# EAGLE board terminalhelper (EAGLE 8.2.2)
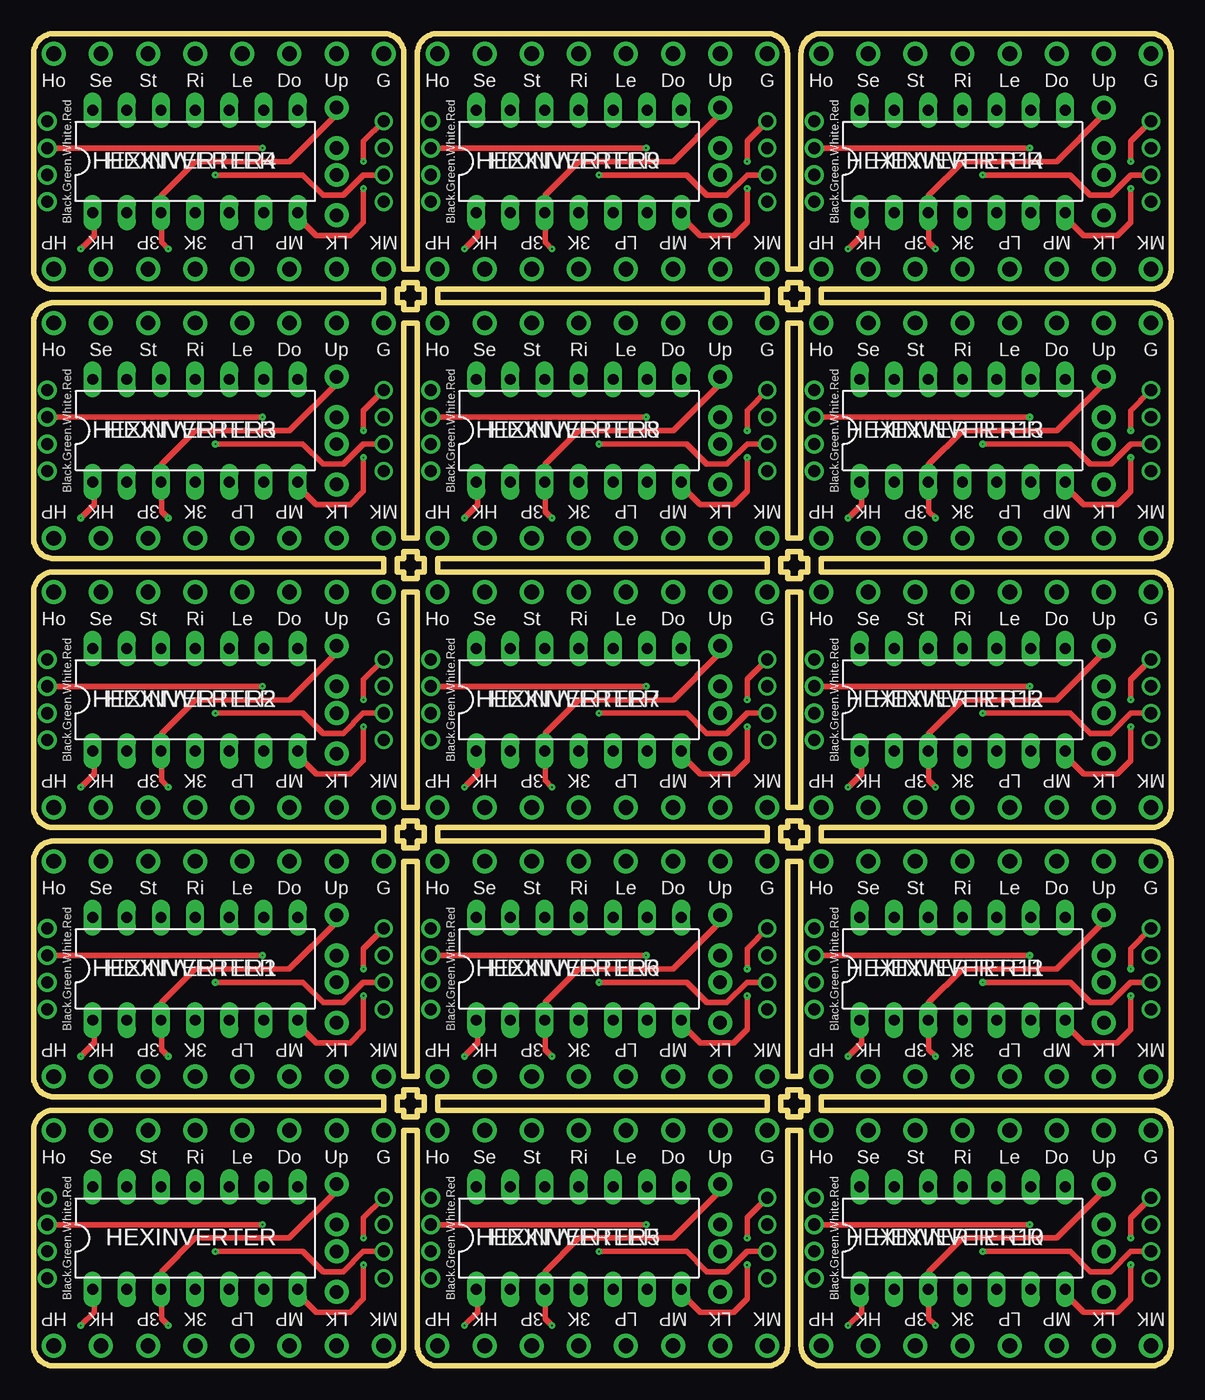
[diagram p0: board, top side]
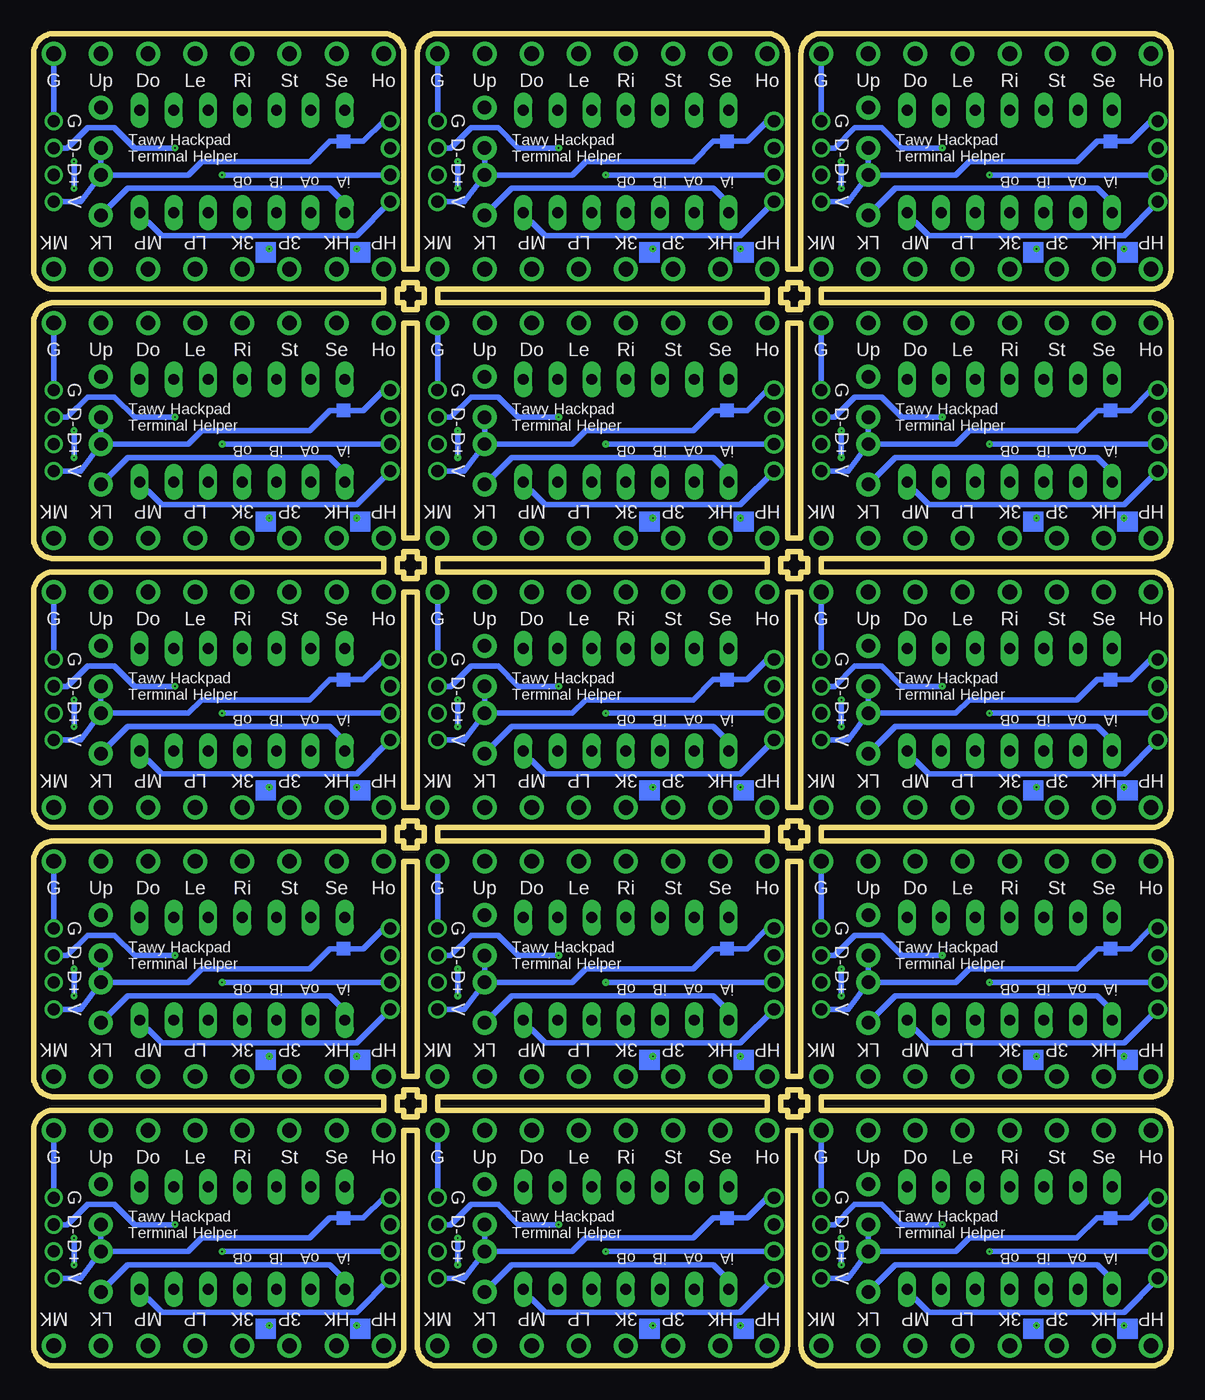
[diagram p1: board, bottom side, seen from below]

Size 84.5 x 99 mm. Coordinates in mm from the lower left corner, seen from the top.
Outline: 0,17.5 0,1.5 arc90 1.5,0 26,0 arc90 27.5,1.5 27.5,17.5 28.5,17.5 28.5,1.5 arc90 30,0 54.5,0 arc90 56,1.5 56,17.5 57,17.5 57,1.5 arc90 58.5,0 83,0 arc90 84.5,1.5 84.5,17.5 arc90 83,19 58.5,19 58.5,20 83,20 arc90 84.5,21.5 84.5,37.5 arc90 83,39 58.5,39 58.5,40 83,40 arc90 84.5,41.5 84.5,57.5 arc90 83,59 58.5,59 58.5,60 83,60 arc90 84.5,61.5 84.5,77.5 arc90 83,79 58.5,79 58.5,80 83,80 arc90 84.5,81.5 84.5,97.5 arc90 83,99 58.5,99 arc90 57,97.5 57,81.5 56,81.5 56,97.5 arc90 54.5,99 30,99 arc90 28.5,97.5 28.5,81.5 27.5,81.5 27.5,97.5 arc90 26,99 1.5,99 arc90 0,97.5 0,81.5 arc90 1.5,80 26,80 26,79 1.5,79 arc90 0,77.5 0,61.5 arc90 1.5,60 26,60 26,59 1.5,59 arc90 0,57.5 0,41.5 arc90 1.5,40 26,40 26,39 1.5,39 arc90 0,37.5 0,21.5 arc90 1.5,20 26,20 26,19 1.5,19 arc90 0,17.5
Outline: 27.5,21.5 27.5,37.5 28.5,37.5 28.5,21.5 27.5,21.5
Outline: 27.5,41.5 27.5,57.5 28.5,57.5 28.5,41.5 27.5,41.5
Outline: 27.5,61.5 27.5,77.5 28.5,77.5 28.5,61.5 27.5,61.5
Outline: 54.5,19 30,19 30,20 54.5,20 54.5,19
Outline: 56,21.5 56,37.5 57,37.5 57,21.5 56,21.5
Outline: 54.5,39 30,39 30,40 54.5,40 54.5,39
Outline: 56,41.5 56,57.5 57,57.5 57,41.5 56,41.5
Outline: 54.5,59 30,59 30,60 54.5,60 54.5,59
Outline: 56,61.5 56,77.5 57,77.5 57,61.5 56,61.5
Outline: 54.5,79 30,79 30,80 54.5,80 54.5,79
Outline: 27.5,60.5 27.5,60 27,60 27,59 27.5,59 27.5,58.5 28.5,58.5 28.5,59 29,59 29,60 28.5,60 28.5,60.5 27.5,60.5
Outline: 27.5,40.5 27.5,40 27,40 27,39 27.5,39 27.5,38.5 28.5,38.5 28.5,39 29,39 29,40 28.5,40 28.5,40.5 27.5,40.5
Outline: 27.5,80.5 27.5,80 27,80 27,79 27.5,79 27.5,78.5 28.5,78.5 28.5,79 29,79 29,80 28.5,80 28.5,80.5 27.5,80.5
Outline: 27.5,20.5 27.5,20 27,20 27,19 27.5,19 27.5,18.5 28.5,18.5 28.5,19 29,19 29,20 28.5,20 28.5,20.5 27.5,20.5
Outline: 56,80.5 56,80 55.5,80 55.5,79 56,79 56,78.5 57,78.5 57,79 57.5,79 57.5,80 57,80 57,80.5 56,80.5
Outline: 56,60.5 56,60 55.5,60 55.5,59 56,59 56,58.5 57,58.5 57,59 57.5,59 57.5,60 57,60 57,60.5 56,60.5
Outline: 56,40.5 56,40 55.5,40 55.5,39 56,39 56,38.5 57,38.5 57,39 57.5,39 57.5,40 57,40 57,40.5 56,40.5
Outline: 56,20.5 56,20 55.5,20 55.5,19 56,19 56,18.5 57,18.5 57,19 57.5,19 57.5,20 57,20 57,20.5 56,20.5
Copper layers (1*16): Top 0.035mm / dielectric 1.5mm / Bottom 0.035mm
Design rules "default *": minimum track width 10mil, minimum drill 24mil, track to track 8mil, track to pad 8mil, pad to pad 8mil, via to via 8mil, smd to smd 8mil, copper to edge 40mil, drill to drill 8mil, minimum pad ring 10mil, minimum via ring 8mil, stop-mask expansion 20mil, vias tented up to drill 10mil, thermal gap 10mil
Net classes: 0 default: clearance 0.205 mm

## Footprints (pad centres in the part's own frame; a part is rotated, then mirrored left to right if it is on the bottom)
DIL14 = drill 0.813 long: 1 -7.62,-3.81; 2 -5.08,-3.81; 3 -2.54,-3.81; 4 0,-3.81; 5 2.54,-3.81; 6 5.08,-3.81; 7 7.62,-3.81; 8 7.62,3.81; 9 5.08,3.81; 10 2.54,3.81; 11 0,3.81; 12 -2.54,3.81; 13 -5.08,3.81; 14 -7.62,3.81

## Placement (x,y rotation side)
HEXINVERTER  [DIL14]  12,9.5 0 top
HEXINVERTER1  [DIL14]  12,29.5 0 top
HEXINVERTER2  [DIL14]  12,49.5 0 top
HEXINVERTER3  [DIL14]  12,69.5 0 top
HEXINVERTER4  [DIL14]  12,89.5 0 top
HEXINVERTER5  [DIL14]  40.5,9.5 0 top
HEXINVERTER6  [DIL14]  40.5,29.5 0 top
HEXINVERTER7  [DIL14]  40.5,49.5 0 top
HEXINVERTER8  [DIL14]  40.5,69.5 0 top
HEXINVERTER9  [DIL14]  40.5,89.5 0 top
HEXINVERTER10  [DIL14]  69,9.5 0 top
HEXINVERTER11  [DIL14]  69,29.5 0 top
HEXINVERTER12  [DIL14]  69,49.5 0 top
HEXINVERTER13  [DIL14]  69,69.5 0 top
HEXINVERTER14  [DIL14]  69,89.5 0 top

## Library data of the parts
HEXINVERTER HEXINVERTER1-HEXINVERTER14 = texas

## Tracks (layer width: path | path; a pad name or v marks a point on that pad's centre or on a via)
D+  (via drill 0.1 pad 0.25, 0.9 pad 1.02, 0.9 pad 1.42)
  Top 0.406: v26,8.5 24.5,8.5 23,7 21.5,7 20,8.5 v13.5,8.5
  Bottom 0.406: v13.5,8.5 v1,8.5
  other vias: 24.5,7.5 24.5,9.5
D+1  (via drill 0.1 pad 0.25, 0.9 pad 1.02, 0.9 pad 1.42)
  Top 0.406: v26,28.5 24.5,28.5 23,27 21.5,27 20,28.5 v13.5,28.5
  Bottom 0.406: v13.5,28.5 v1,28.5
  other vias: 24.5,27.5 24.5,29.5
D+2  (via drill 0.1 pad 0.25, 0.9 pad 1.02, 0.9 pad 1.42)
  Top 0.406: v26,48.5 24.5,48.5 23,47 21.5,47 20,48.5 v13.5,48.5
  Bottom 0.406: v13.5,48.5 v1,48.5
  other vias: 24.5,47.5 24.5,49.5
D+3  (via drill 0.1 pad 0.25, 0.9 pad 1.02, 0.9 pad 1.42)
  Top 0.406: v26,68.5 24.5,68.5 23,67 21.5,67 20,68.5 v13.5,68.5
  Bottom 0.406: v13.5,68.5 v1,68.5
  other vias: 24.5,67.5 24.5,69.5
D+4  (via drill 0.1 pad 0.25, 0.9 pad 1.02, 0.9 pad 1.42)
  Top 0.406: v26,88.5 24.5,88.5 23,87 21.5,87 20,88.5 v13.5,88.5
  Bottom 0.406: v13.5,88.5 v1,88.5
  other vias: 24.5,87.5 24.5,89.5
D+5  (via drill 0.1 pad 0.25, 0.9 pad 1.02, 0.9 pad 1.42)
  Top 0.406: v54.5,8.5 53,8.5 51.5,7 50,7 48.5,8.5 v42,8.5
  Bottom 0.406: v42,8.5 v29.5,8.5
  other vias: 53,7.5 53,9.5
D+6  (via drill 0.1 pad 0.25, 0.9 pad 1.02, 0.9 pad 1.42)
  Top 0.406: v54.5,28.5 53,28.5 51.5,27 50,27 48.5,28.5 v42,28.5
  Bottom 0.406: v42,28.5 v29.5,28.5
  other vias: 53,27.5 53,29.5
D+7  (via drill 0.1 pad 0.25, 0.9 pad 1.02, 0.9 pad 1.42)
  Top 0.406: v54.5,48.5 53,48.5 51.5,47 50,47 48.5,48.5 v42,48.5
  Bottom 0.406: v42,48.5 v29.5,48.5
  other vias: 53,47.5 53,49.5
D+8  (via drill 0.1 pad 0.25, 0.9 pad 1.02, 0.9 pad 1.42)
  Top 0.406: v54.5,68.5 53,68.5 51.5,67 50,67 48.5,68.5 v42,68.5
  Bottom 0.406: v42,68.5 v29.5,68.5
  other vias: 53,67.5 53,69.5
D+9  (via drill 0.1 pad 0.25, 0.9 pad 1.02, 0.9 pad 1.42)
  Top 0.406: v54.5,88.5 53,88.5 51.5,87 50,87 48.5,88.5 v42,88.5
  Bottom 0.406: v42,88.5 v29.5,88.5
  other vias: 53,87.5 53,89.5
D+10  (via drill 0.1 pad 0.25, 0.9 pad 1.02, 0.9 pad 1.42)
  Top 0.406: v83,8.5 81.5,8.5 80,7 78.5,7 77,8.5 v70.5,8.5
  Bottom 0.406: v70.5,8.5 v58,8.5
  other vias: 81.5,7.5 81.5,9.5
D+11  (via drill 0.1 pad 0.25, 0.9 pad 1.02, 0.9 pad 1.42)
  Top 0.406: v83,28.5 81.5,28.5 80,27 78.5,27 77,28.5 v70.5,28.5
  Bottom 0.406: v70.5,28.5 v58,28.5
  other vias: 81.5,27.5 81.5,29.5
D+12  (via drill 0.1 pad 0.25, 0.9 pad 1.02, 0.9 pad 1.42)
  Top 0.406: v83,48.5 81.5,48.5 80,47 78.5,47 77,48.5 v70.5,48.5
  Bottom 0.406: v70.5,48.5 v58,48.5
  other vias: 81.5,47.5 81.5,49.5
D+13  (via drill 0.1 pad 0.25, 0.9 pad 1.02, 0.9 pad 1.42)
  Top 0.406: v83,68.5 81.5,68.5 80,67 78.5,67 77,68.5 v70.5,68.5
  Bottom 0.406: v70.5,68.5 v58,68.5
  other vias: 81.5,67.5 81.5,69.5
D+14  (via drill 0.1 pad 0.25, 0.9 pad 1.02, 0.9 pad 1.42)
  Top 0.406: v83,88.5 81.5,88.5 80,87 78.5,87 77,88.5 v70.5,88.5
  Bottom 0.406: v70.5,88.5 v58,88.5
  other vias: 81.5,87.5 81.5,89.5
D-  (via drill 0.1 pad 0.25, 0.9 pad 1.02, 0.9 pad 1.42)
  Top 0.406: v17,10.5 v1,10.5
  Bottom 0.406: v26,10.5 25,10.5 23.5,12 21.5,12 20,10.5 v17,10.5
  other vias: 3.5,3 10,3
D-1  (via drill 0.1 pad 0.25, 0.9 pad 1.02, 0.9 pad 1.42)
  Top 0.406: v17,30.5 v1,30.5
  Bottom 0.406: v26,30.5 25,30.5 23.5,32 21.5,32 20,30.5 v17,30.5
  other vias: 3.5,23 10,23
D-2  (via drill 0.1 pad 0.25, 0.9 pad 1.02, 0.9 pad 1.42)
  Top 0.406: v17,50.5 v1,50.5
  Bottom 0.406: v26,50.5 25,50.5 23.5,52 21.5,52 20,50.5 v17,50.5
  other vias: 3.5,43 10,43
D-3  (via drill 0.1 pad 0.25, 0.9 pad 1.02, 0.9 pad 1.42)
  Top 0.406: v17,70.5 v1,70.5
  Bottom 0.406: v26,70.5 25,70.5 23.5,72 21.5,72 20,70.5 v17,70.5
  other vias: 3.5,63 10,63
D-4  (via drill 0.1 pad 0.25, 0.9 pad 1.02, 0.9 pad 1.42)
  Top 0.406: v17,90.5 v1,90.5
  Bottom 0.406: v26,90.5 25,90.5 23.5,92 21.5,92 20,90.5 v17,90.5
  other vias: 3.5,83 10,83
D-5  (via drill 0.1 pad 0.25, 0.9 pad 1.02, 0.9 pad 1.42)
  Top 0.406: v45.5,10.5 v29.5,10.5
  Bottom 0.406: v54.5,10.5 53.5,10.5 52,12 50,12 48.5,10.5 v45.5,10.5
  other vias: 32,3 38.5,3
D-6  (via drill 0.1 pad 0.25, 0.9 pad 1.02, 0.9 pad 1.42)
  Top 0.406: v45.5,30.5 v29.5,30.5
  Bottom 0.406: v54.5,30.5 53.5,30.5 52,32 50,32 48.5,30.5 v45.5,30.5
  other vias: 32,23 38.5,23
D-7  (via drill 0.1 pad 0.25, 0.9 pad 1.02, 0.9 pad 1.42)
  Top 0.406: v45.5,50.5 v29.5,50.5
  Bottom 0.406: v54.5,50.5 53.5,50.5 52,52 50,52 48.5,50.5 v45.5,50.5
  other vias: 32,43 38.5,43
D-8  (via drill 0.1 pad 0.25, 0.9 pad 1.02, 0.9 pad 1.42)
  Top 0.406: v45.5,70.5 v29.5,70.5
  Bottom 0.406: v54.5,70.5 53.5,70.5 52,72 50,72 48.5,70.5 v45.5,70.5
  other vias: 32,63 38.5,63
D-9  (via drill 0.1 pad 0.25, 0.9 pad 1.02, 0.9 pad 1.42)
  Top 0.406: v45.5,90.5 v29.5,90.5
  Bottom 0.406: v54.5,90.5 53.5,90.5 52,92 50,92 48.5,90.5 v45.5,90.5
  other vias: 32,83 38.5,83
D-10  (via drill 0.1 pad 0.25, 0.9 pad 1.02, 0.9 pad 1.42)
  Top 0.406: v74,10.5 v58,10.5
  Bottom 0.406: v83,10.5 82,10.5 80.5,12 78.5,12 77,10.5 v74,10.5
  other vias: 60.5,3 67,3
D-11  (via drill 0.1 pad 0.25, 0.9 pad 1.02, 0.9 pad 1.42)
  Top 0.406: v74,30.5 v58,30.5
  Bottom 0.406: v83,30.5 82,30.5 80.5,32 78.5,32 77,30.5 v74,30.5
  other vias: 60.5,23 67,23
D-12  (via drill 0.1 pad 0.25, 0.9 pad 1.02, 0.9 pad 1.42)
  Top 0.406: v74,50.5 v58,50.5
  Bottom 0.406: v83,50.5 82,50.5 80.5,52 78.5,52 77,50.5 v74,50.5
  other vias: 60.5,43 67,43
D-13  (via drill 0.1 pad 0.25, 0.9 pad 1.02, 0.9 pad 1.42)
  Top 0.406: v74,70.5 v58,70.5
  Bottom 0.406: v83,70.5 82,70.5 80.5,72 78.5,72 77,70.5 v74,70.5
  other vias: 60.5,63 67,63
D-14  (via drill 0.1 pad 0.25, 0.9 pad 1.02, 0.9 pad 1.42)
  Top 0.406: v74,90.5 v58,90.5
  Bottom 0.406: v83,90.5 82,90.5 80.5,92 78.5,92 77,90.5 v74,90.5
  other vias: 60.5,83 67,83
GND  (via drill 0.9 pad 1.42)
  Bottom 0.406: v1,6.5 3.5,4 18,4 19,5 20,5
GND1  (via drill 0.9 pad 1.42)
  Bottom 0.406: v1,26.5 3.5,24 18,24 19,25 20,25
GND2  (via drill 0.9 pad 1.42)
  Bottom 0.406: v1,46.5 3.5,44 18,44 19,45 20,45
GND3  (via drill 0.9 pad 1.42)
  Bottom 0.406: v1,66.5 3.5,64 18,64 19,65 20,65
GND4  (via drill 0.9 pad 1.42)
  Bottom 0.406: v1,86.5 3.5,84 18,84 19,85 20,85
GND5  (via drill 0.9 pad 1.42)
  Bottom 0.406: v29.5,6.5 32,4 46.5,4 47.5,5 48.5,5
GND6  (via drill 0.9 pad 1.42)
  Bottom 0.406: v29.5,26.5 32,24 46.5,24 47.5,25 48.5,25
GND7  (via drill 0.9 pad 1.42)
  Bottom 0.406: v29.5,46.5 32,44 46.5,44 47.5,45 48.5,45
GND8  (via drill 0.9 pad 1.42)
  Bottom 0.406: v29.5,66.5 32,64 46.5,64 47.5,65 48.5,65
GND9  (via drill 0.9 pad 1.42)
  Bottom 0.406: v29.5,86.5 32,84 46.5,84 47.5,85 48.5,85
GND10  (via drill 0.9 pad 1.42)
  Bottom 0.406: v58,6.5 60.5,4 75,4 76,5 77,5
GND11  (via drill 0.9 pad 1.42)
  Bottom 0.406: v58,26.5 60.5,24 75,24 76,25 77,25
GND12  (via drill 0.9 pad 1.42)
  Bottom 0.406: v58,46.5 60.5,44 75,44 76,45 77,45
GND13  (via drill 0.9 pad 1.42)
  Bottom 0.406: v58,66.5 60.5,64 75,64 76,65 77,65
GND14  (via drill 0.9 pad 1.42)
  Bottom 0.406: v58,86.5 60.5,84 75,84 76,85 77,85
S$1  (via drill 1.1 pad 1.78)
  other vias: 5,1.5
S$2  (via drill 1.1 pad 1.78)
  other vias: 1.5,1.5
S$3  (via drill 1.1 pad 1.78)
  other vias: 8.5,1.5
S$4  (via drill 1.1 pad 1.78)
  other vias: 15.5,1.5
S$5  (via drill 1.1 pad 1.78)
  other vias: 8.5,17.5
S$6  (via drill 1.1 pad 1.78)
  other vias: 15.5,17.5
S$7  (via drill 1.1 pad 1.78)
  other vias: 5,17.5
S$8  (via drill 1.1 pad 1.78)
  other vias: 1.5,17.5
S$9  (via drill 1 pad 1.78)
  Top 0.406: v22.5,13.5 22.5,13 19,9.5 12,9.5 9.5,7 9.5,3.5 10,3
S$10  (via drill 1.1 pad 1.78)
  other vias: 22.5,17.5
S$11  (via drill 1.1 pad 1.78)
  other vias: 19,17.5
S$12  (via drill 1 pad 1.78)
  Bottom 0.406: v22.5,5.5 20.5,7.5 5.5,7.5 4.5,6.5 4.5,5.5
S$13  (via drill 1.1 pad 1.78)
  other vias: 12,17.5
S$14
  Top 0.406: 24.5,7.5 24.5,5 23.5,4 21,4 20,5
S$15
  Bottom 0.406: 24.5,9.5 24.5,7.5
S$16  (via drill 1.1 pad 1.78)
  other vias: 26,1.5
S$17  (via drill 1.1 pad 1.78)
  other vias: 22.5,1.5
S$18  (via drill 1.1 pad 1.78)
  other vias: 19,1.5
S$19  (via drill 1.1 pad 1.78)
  other vias: 12,1.5
S$20
  Top 0.406: 4.5,5.5 4.5,4 3.5,3
S$21  (via drill 0.9 pad 1.02, 1.1 pad 1.78)
  Top 0.406: v26,12.5 24.5,11 24.5,9.5
  Bottom 0.406: v26,12.5 v26,17.5
S$22  (via drill 1.1 pad 1.78)
  other vias: 8.5,21.5
S$23  (via drill 1.1 pad 1.78)
  other vias: 26,21.5
S$24  (via drill 1.1 pad 1.78)
  other vias: 22.5,21.5
S$25  (via drill 1.1 pad 1.78)
  other vias: 19,21.5
S$26  (via drill 1.1 pad 1.78)
  other vias: 12,21.5
S$27  (via drill 1.1 pad 1.78)
  other vias: 15.5,21.5
S$28  (via drill 1.1 pad 1.78)
  other vias: 5,21.5
S$29  (via drill 1.1 pad 1.78)
  other vias: 1.5,21.5
S$30  (via drill 1.1 pad 1.78)
  other vias: 8.5,37.5
S$31  (via drill 1.1 pad 1.78)
  other vias: 5,37.5
S$32  (via drill 1.1 pad 1.78)
  other vias: 1.5,37.5
S$33  (via drill 1.1 pad 1.78)
  other vias: 19,37.5
S$34  (via drill 1.1 pad 1.78)
  other vias: 12,37.5
S$35  (via drill 1.1 pad 1.78)
  other vias: 15.5,37.5
S$36  (via drill 1.1 pad 1.78)
  other vias: 22.5,37.5
S$37  (via drill 0.9 pad 1.02, 1.1 pad 1.78)
  Top 0.406: v26,32.5 24.5,31 24.5,29.5
  Bottom 0.406: v26,32.5 v26,37.5
S$38  (via drill 1 pad 1.78)
  Top 0.406: v22.5,33.5 22.5,33 19,29.5 12,29.5 9.5,27 9.5,23.5 10,23
S$39  (via drill 1 pad 1.78)
  Bottom 0.406: v22.5,25.5 20.5,27.5 5.5,27.5 4.5,26.5 4.5,25.5
S$40
  Top 0.406: 4.5,25.5 4.5,24 3.5,23
S$41
  Top 0.406: 24.5,27.5 24.5,25 23.5,24 21,24 20,25
S$42
  Bottom 0.406: 24.5,29.5 24.5,27.5
S$43  (via drill 1.1 pad 1.78)
  other vias: 8.5,41.5
S$44  (via drill 1.1 pad 1.78)
  other vias: 26,41.5
S$45  (via drill 1.1 pad 1.78)
  other vias: 22.5,41.5
S$46  (via drill 1.1 pad 1.78)
  other vias: 19,41.5
S$47  (via drill 1.1 pad 1.78)
  other vias: 12,41.5
S$48  (via drill 1.1 pad 1.78)
  other vias: 15.5,41.5
S$49  (via drill 1.1 pad 1.78)
  other vias: 5,41.5
S$50  (via drill 1.1 pad 1.78)
  other vias: 1.5,41.5
S$51  (via drill 1.1 pad 1.78)
  other vias: 8.5,57.5
S$52  (via drill 1.1 pad 1.78)
  other vias: 5,57.5
S$53  (via drill 1.1 pad 1.78)
  other vias: 1.5,57.5
S$54  (via drill 1.1 pad 1.78)
  other vias: 19,57.5
S$55  (via drill 1.1 pad 1.78)
  other vias: 12,57.5
S$56  (via drill 1.1 pad 1.78)
  other vias: 15.5,57.5
S$57  (via drill 1.1 pad 1.78)
  other vias: 22.5,57.5
S$58  (via drill 0.9 pad 1.02, 1.1 pad 1.78)
  Top 0.406: v26,52.5 24.5,51 24.5,49.5
  Bottom 0.406: v26,52.5 v26,57.5
S$59  (via drill 1 pad 1.78)
  Top 0.406: v22.5,53.5 22.5,53 19,49.5 12,49.5 9.5,47 9.5,43.5 10,43
S$60  (via drill 1 pad 1.78)
  Bottom 0.406: v22.5,45.5 20.5,47.5 5.5,47.5 4.5,46.5 4.5,45.5
S$61
  Top 0.406: 4.5,45.5 4.5,44 3.5,43
S$62
  Top 0.406: 24.5,47.5 24.5,45 23.5,44 21,44 20,45
S$63
  Bottom 0.406: 24.5,49.5 24.5,47.5
S$64  (via drill 1.1 pad 1.78)
  other vias: 8.5,61.5
S$65  (via drill 1.1 pad 1.78)
  other vias: 26,61.5
S$66  (via drill 1.1 pad 1.78)
  other vias: 22.5,61.5
S$67  (via drill 1.1 pad 1.78)
  other vias: 19,61.5
S$68  (via drill 1.1 pad 1.78)
  other vias: 12,61.5
S$69  (via drill 1.1 pad 1.78)
  other vias: 15.5,61.5
S$70  (via drill 1.1 pad 1.78)
  other vias: 5,61.5
S$71  (via drill 1.1 pad 1.78)
  other vias: 1.5,61.5
S$72  (via drill 1.1 pad 1.78)
  other vias: 8.5,77.5
S$73  (via drill 1.1 pad 1.78)
  other vias: 5,77.5
S$74  (via drill 1.1 pad 1.78)
  other vias: 1.5,77.5
S$75  (via drill 1.1 pad 1.78)
  other vias: 19,77.5
S$76  (via drill 1.1 pad 1.78)
  other vias: 12,77.5
S$77  (via drill 1.1 pad 1.78)
  other vias: 15.5,77.5
S$78  (via drill 1.1 pad 1.78)
  other vias: 22.5,77.5
S$79  (via drill 0.9 pad 1.02, 1.1 pad 1.78)
  Top 0.406: v26,72.5 24.5,71 24.5,69.5
  Bottom 0.406: v26,72.5 v26,77.5
S$80  (via drill 1 pad 1.78)
  Top 0.406: v22.5,73.5 22.5,73 19,69.5 12,69.5 9.5,67 9.5,63.5 10,63
S$81  (via drill 1 pad 1.78)
  Bottom 0.406: v22.5,65.5 20.5,67.5 5.5,67.5 4.5,66.5 4.5,65.5
S$82
  Top 0.406: 4.5,65.5 4.5,64 3.5,63
S$83
  Top 0.406: 24.5,67.5 24.5,65 23.5,64 21,64 20,65
S$84
  Bottom 0.406: 24.5,69.5 24.5,67.5
S$85  (via drill 1.1 pad 1.78)
  other vias: 8.5,81.5
S$86  (via drill 1.1 pad 1.78)
  other vias: 26,81.5
S$87  (via drill 1.1 pad 1.78)
  other vias: 22.5,81.5
S$88  (via drill 1.1 pad 1.78)
  other vias: 19,81.5
S$89  (via drill 1.1 pad 1.78)
  other vias: 12,81.5
S$90  (via drill 1.1 pad 1.78)
  other vias: 15.5,81.5
S$91  (via drill 1.1 pad 1.78)
  other vias: 5,81.5
S$92  (via drill 1.1 pad 1.78)
  other vias: 1.5,81.5
S$93  (via drill 1.1 pad 1.78)
  other vias: 8.5,97.5
S$94  (via drill 1.1 pad 1.78)
  other vias: 5,97.5
S$95  (via drill 1.1 pad 1.78)
  other vias: 1.5,97.5
S$96  (via drill 1.1 pad 1.78)
  other vias: 19,97.5
S$97  (via drill 1.1 pad 1.78)
  other vias: 12,97.5
S$98  (via drill 1.1 pad 1.78)
  other vias: 15.5,97.5
S$99  (via drill 1.1 pad 1.78)
  other vias: 22.5,97.5
S$100  (via drill 0.9 pad 1.02, 1.1 pad 1.78)
  Top 0.406: v26,92.5 24.5,91 24.5,89.5
  Bottom 0.406: v26,92.5 v26,97.5
S$101  (via drill 1 pad 1.78)
  Top 0.406: v22.5,93.5 22.5,93 19,89.5 12,89.5 9.5,87 9.5,83.5 10,83
S$102  (via drill 1 pad 1.78)
  Bottom 0.406: v22.5,85.5 20.5,87.5 5.5,87.5 4.5,86.5 4.5,85.5
S$103
  Top 0.406: 4.5,85.5 4.5,84 3.5,83
S$104
  Top 0.406: 24.5,87.5 24.5,85 23.5,84 21,84 20,85
S$105
  Bottom 0.406: 24.5,89.5 24.5,87.5
S$106  (via drill 1.1 pad 1.78)
  other vias: 37,1.5
S$107  (via drill 1.1 pad 1.78)
  other vias: 54.5,1.5
S$108  (via drill 1.1 pad 1.78)
  other vias: 51,1.5
S$109  (via drill 1.1 pad 1.78)
  other vias: 47.5,1.5
S$110  (via drill 1.1 pad 1.78)
  other vias: 40.5,1.5
S$111  (via drill 1.1 pad 1.78)
  other vias: 44,1.5
S$112  (via drill 1.1 pad 1.78)
  other vias: 33.5,1.5
S$113  (via drill 1.1 pad 1.78)
  other vias: 30,1.5
S$114  (via drill 1.1 pad 1.78)
  other vias: 37,17.5
S$115  (via drill 1.1 pad 1.78)
  other vias: 33.5,17.5
S$116  (via drill 1.1 pad 1.78)
  other vias: 30,17.5
S$117  (via drill 1.1 pad 1.78)
  other vias: 47.5,17.5
S$118  (via drill 1.1 pad 1.78)
  other vias: 40.5,17.5
S$119  (via drill 1.1 pad 1.78)
  other vias: 44,17.5
S$120  (via drill 1.1 pad 1.78)
  other vias: 51,17.5
S$121  (via drill 0.9 pad 1.02, 1.1 pad 1.78)
  Top 0.406: v54.5,12.5 53,11 53,9.5
  Bottom 0.406: v54.5,12.5 v54.5,17.5
S$122  (via drill 1 pad 1.78)
  Top 0.406: v51,13.5 51,13 47.5,9.5 40.5,9.5 38,7 38,3.5 38.5,3
S$123  (via drill 1 pad 1.78)
  Bottom 0.406: v51,5.5 49,7.5 34,7.5 33,6.5 33,5.5
S$124
  Top 0.406: 33,5.5 33,4 32,3
S$125
  Top 0.406: 53,7.5 53,5 52,4 49.5,4 48.5,5
S$126
  Bottom 0.406: 53,9.5 53,7.5
S$127  (via drill 1.1 pad 1.78)
  other vias: 37,21.5
S$128  (via drill 1.1 pad 1.78)
  other vias: 54.5,21.5
S$129  (via drill 1.1 pad 1.78)
  other vias: 51,21.5
S$130  (via drill 1.1 pad 1.78)
  other vias: 47.5,21.5
S$131  (via drill 1.1 pad 1.78)
  other vias: 40.5,21.5
S$132  (via drill 1.1 pad 1.78)
  other vias: 44,21.5
S$133  (via drill 1.1 pad 1.78)
  other vias: 33.5,21.5
S$134  (via drill 1.1 pad 1.78)
  other vias: 30,21.5
S$135  (via drill 1.1 pad 1.78)
  other vias: 37,37.5
S$136  (via drill 1.1 pad 1.78)
  other vias: 33.5,37.5
S$137  (via drill 1.1 pad 1.78)
  other vias: 30,37.5
S$138  (via drill 1.1 pad 1.78)
  other vias: 47.5,37.5
S$139  (via drill 1.1 pad 1.78)
  other vias: 40.5,37.5
S$140  (via drill 1.1 pad 1.78)
  other vias: 44,37.5
S$141  (via drill 1.1 pad 1.78)
  other vias: 51,37.5
S$142  (via drill 0.9 pad 1.02, 1.1 pad 1.78)
  Top 0.406: v54.5,32.5 53,31 53,29.5
  Bottom 0.406: v54.5,32.5 v54.5,37.5
S$143  (via drill 1 pad 1.78)
  Top 0.406: v51,33.5 51,33 47.5,29.5 40.5,29.5 38,27 38,23.5 38.5,23
S$144  (via drill 1 pad 1.78)
  Bottom 0.406: v51,25.5 49,27.5 34,27.5 33,26.5 33,25.5
S$145
  Top 0.406: 33,25.5 33,24 32,23
S$146
  Top 0.406: 53,27.5 53,25 52,24 49.5,24 48.5,25
S$147
  Bottom 0.406: 53,29.5 53,27.5
S$148  (via drill 1.1 pad 1.78)
  other vias: 37,41.5
S$149  (via drill 1.1 pad 1.78)
  other vias: 54.5,41.5
S$150  (via drill 1.1 pad 1.78)
  other vias: 51,41.5
S$151  (via drill 1.1 pad 1.78)
  other vias: 47.5,41.5
S$152  (via drill 1.1 pad 1.78)
  other vias: 40.5,41.5
S$153  (via drill 1.1 pad 1.78)
  other vias: 44,41.5
S$154  (via drill 1.1 pad 1.78)
  other vias: 33.5,41.5
S$155  (via drill 1.1 pad 1.78)
  other vias: 30,41.5
S$156  (via drill 1.1 pad 1.78)
  other vias: 37,57.5
S$157  (via drill 1.1 pad 1.78)
  other vias: 33.5,57.5
S$158  (via drill 1.1 pad 1.78)
  other vias: 30,57.5
S$159  (via drill 1.1 pad 1.78)
  other vias: 47.5,57.5
S$160  (via drill 1.1 pad 1.78)
  other vias: 40.5,57.5
S$161  (via drill 1.1 pad 1.78)
  other vias: 44,57.5
S$162  (via drill 1.1 pad 1.78)
  other vias: 51,57.5
S$163  (via drill 0.9 pad 1.02, 1.1 pad 1.78)
  Top 0.406: v54.5,52.5 53,51 53,49.5
  Bottom 0.406: v54.5,52.5 v54.5,57.5
S$164  (via drill 1 pad 1.78)
  Top 0.406: v51,53.5 51,53 47.5,49.5 40.5,49.5 38,47 38,43.5 38.5,43
S$165  (via drill 1 pad 1.78)
  Bottom 0.406: v51,45.5 49,47.5 34,47.5 33,46.5 33,45.5
S$166
  Top 0.406: 33,45.5 33,44 32,43
S$167
  Top 0.406: 53,47.5 53,45 52,44 49.5,44 48.5,45
S$168
  Bottom 0.406: 53,49.5 53,47.5
S$169  (via drill 1.1 pad 1.78)
  other vias: 37,61.5
S$170  (via drill 1.1 pad 1.78)
  other vias: 54.5,61.5
S$171  (via drill 1.1 pad 1.78)
  other vias: 51,61.5
S$172  (via drill 1.1 pad 1.78)
  other vias: 47.5,61.5
S$173  (via drill 1.1 pad 1.78)
  other vias: 40.5,61.5
S$174  (via drill 1.1 pad 1.78)
  other vias: 44,61.5
S$175  (via drill 1.1 pad 1.78)
  other vias: 33.5,61.5
S$176  (via drill 1.1 pad 1.78)
  other vias: 30,61.5
S$177  (via drill 1.1 pad 1.78)
  other vias: 37,77.5
S$178  (via drill 1.1 pad 1.78)
  other vias: 33.5,77.5
S$179  (via drill 1.1 pad 1.78)
  other vias: 30,77.5
S$180  (via drill 1.1 pad 1.78)
  other vias: 47.5,77.5
S$181  (via drill 1.1 pad 1.78)
  other vias: 40.5,77.5
S$182  (via drill 1.1 pad 1.78)
  other vias: 44,77.5
S$183  (via drill 1.1 pad 1.78)
  other vias: 51,77.5
S$184  (via drill 0.9 pad 1.02, 1.1 pad 1.78)
  Top 0.406: v54.5,72.5 53,71 53,69.5
  Bottom 0.406: v54.5,72.5 v54.5,77.5
S$185  (via drill 1 pad 1.78)
  Top 0.406: v51,73.5 51,73 47.5,69.5 40.5,69.5 38,67 38,63.5 38.5,63
S$186  (via drill 1 pad 1.78)
  Bottom 0.406: v51,65.5 49,67.5 34,67.5 33,66.5 33,65.5
S$187
  Top 0.406: 33,65.5 33,64 32,63
S$188
  Top 0.406: 53,67.5 53,65 52,64 49.5,64 48.5,65
S$189
  Bottom 0.406: 53,69.5 53,67.5
S$190  (via drill 1.1 pad 1.78)
  other vias: 37,81.5
S$191  (via drill 1.1 pad 1.78)
  other vias: 54.5,81.5
S$192  (via drill 1.1 pad 1.78)
  other vias: 51,81.5
S$193  (via drill 1.1 pad 1.78)
  other vias: 47.5,81.5
S$194  (via drill 1.1 pad 1.78)
  other vias: 40.5,81.5
S$195  (via drill 1.1 pad 1.78)
  other vias: 44,81.5
S$196  (via drill 1.1 pad 1.78)
  other vias: 33.5,81.5
S$197  (via drill 1.1 pad 1.78)
  other vias: 30,81.5
S$198  (via drill 1.1 pad 1.78)
  other vias: 37,97.5
S$199  (via drill 1.1 pad 1.78)
  other vias: 33.5,97.5
S$200  (via drill 1.1 pad 1.78)
  other vias: 30,97.5
S$201  (via drill 1.1 pad 1.78)
  other vias: 47.5,97.5
S$202  (via drill 1.1 pad 1.78)
  other vias: 40.5,97.5
S$203  (via drill 1.1 pad 1.78)
  other vias: 44,97.5
S$204  (via drill 1.1 pad 1.78)
  other vias: 51,97.5
S$205  (via drill 0.9 pad 1.02, 1.1 pad 1.78)
  Top 0.406: v54.5,92.5 53,91 53,89.5
  Bottom 0.406: v54.5,92.5 v54.5,97.5
S$206  (via drill 1 pad 1.78)
  Top 0.406: v51,93.5 51,93 47.5,89.5 40.5,89.5 38,87 38,83.5 38.5,83
S$207  (via drill 1 pad 1.78)
  Bottom 0.406: v51,85.5 49,87.5 34,87.5 33,86.5 33,85.5
S$208
  Top 0.406: 33,85.5 33,84 32,83
S$209
  Top 0.406: 53,87.5 53,85 52,84 49.5,84 48.5,85
S$210
  Bottom 0.406: 53,89.5 53,87.5
S$211  (via drill 1.1 pad 1.78)
  other vias: 65.5,1.5
S$212  (via drill 1.1 pad 1.78)
  other vias: 83,1.5
S$213  (via drill 1.1 pad 1.78)
  other vias: 79.5,1.5
S$214  (via drill 1.1 pad 1.78)
  other vias: 76,1.5
S$215  (via drill 1.1 pad 1.78)
  other vias: 69,1.5
S$216  (via drill 1.1 pad 1.78)
  other vias: 72.5,1.5
S$217  (via drill 1.1 pad 1.78)
  other vias: 62,1.5
S$218  (via drill 1.1 pad 1.78)
  other vias: 58.5,1.5
S$219  (via drill 1.1 pad 1.78)
  other vias: 65.5,17.5
S$220  (via drill 1.1 pad 1.78)
  other vias: 62,17.5
S$221  (via drill 1.1 pad 1.78)
  other vias: 58.5,17.5
S$222  (via drill 1.1 pad 1.78)
  other vias: 76,17.5
S$223  (via drill 1.1 pad 1.78)
  other vias: 69,17.5
S$224  (via drill 1.1 pad 1.78)
  other vias: 72.5,17.5
S$225  (via drill 1.1 pad 1.78)
  other vias: 79.5,17.5
S$226  (via drill 0.9 pad 1.02, 1.1 pad 1.78)
  Top 0.406: v83,12.5 81.5,11 81.5,9.5
  Bottom 0.406: v83,12.5 v83,17.5
S$227  (via drill 1 pad 1.78)
  Top 0.406: v79.5,13.5 79.5,13 76,9.5 69,9.5 66.5,7 66.5,3.5 67,3
S$228  (via drill 1 pad 1.78)
  Bottom 0.406: v79.5,5.5 77.5,7.5 62.5,7.5 61.5,6.5 61.5,5.5
S$229
  Top 0.406: 61.5,5.5 61.5,4 60.5,3
S$230
  Top 0.406: 81.5,7.5 81.5,5 80.5,4 78,4 77,5
S$231
  Bottom 0.406: 81.5,9.5 81.5,7.5
S$232  (via drill 1.1 pad 1.78)
  other vias: 65.5,21.5
S$233  (via drill 1.1 pad 1.78)
  other vias: 83,21.5
S$234  (via drill 1.1 pad 1.78)
  other vias: 79.5,21.5
S$235  (via drill 1.1 pad 1.78)
  other vias: 76,21.5
S$236  (via drill 1.1 pad 1.78)
  other vias: 69,21.5
S$237  (via drill 1.1 pad 1.78)
  other vias: 72.5,21.5
S$238  (via drill 1.1 pad 1.78)
  other vias: 62,21.5
S$239  (via drill 1.1 pad 1.78)
  other vias: 58.5,21.5
S$240  (via drill 1.1 pad 1.78)
  other vias: 65.5,37.5
S$241  (via drill 1.1 pad 1.78)
  other vias: 62,37.5
S$242  (via drill 1.1 pad 1.78)
  other vias: 58.5,37.5
S$243  (via drill 1.1 pad 1.78)
  other vias: 76,37.5
S$244  (via drill 1.1 pad 1.78)
  other vias: 69,37.5
S$245  (via drill 1.1 pad 1.78)
  other vias: 72.5,37.5
S$246  (via drill 1.1 pad 1.78)
  other vias: 79.5,37.5
S$247  (via drill 0.9 pad 1.02, 1.1 pad 1.78)
  Top 0.406: v83,32.5 81.5,31 81.5,29.5
  Bottom 0.406: v83,32.5 v83,37.5
S$248  (via drill 1 pad 1.78)
  Top 0.406: v79.5,33.5 79.5,33 76,29.5 69,29.5 66.5,27 66.5,23.5 67,23
S$249  (via drill 1 pad 1.78)
  Bottom 0.406: v79.5,25.5 77.5,27.5 62.5,27.5 61.5,26.5 61.5,25.5
S$250
  Top 0.406: 61.5,25.5 61.5,24 60.5,23
S$251
  Top 0.406: 81.5,27.5 81.5,25 80.5,24 78,24 77,25
S$252
  Bottom 0.406: 81.5,29.5 81.5,27.5
S$253  (via drill 1.1 pad 1.78)
  other vias: 65.5,41.5
S$254  (via drill 1.1 pad 1.78)
  other vias: 83,41.5
S$255  (via drill 1.1 pad 1.78)
  other vias: 79.5,41.5
S$256  (via drill 1.1 pad 1.78)
  other vias: 76,41.5
S$257  (via drill 1.1 pad 1.78)
  other vias: 69,41.5
S$258  (via drill 1.1 pad 1.78)
  other vias: 72.5,41.5
S$259  (via drill 1.1 pad 1.78)
  other vias: 62,41.5
S$260  (via drill 1.1 pad 1.78)
  other vias: 58.5,41.5
S$261  (via drill 1.1 pad 1.78)
  other vias: 65.5,57.5
S$262  (via drill 1.1 pad 1.78)
  other vias: 62,57.5
S$263  (via drill 1.1 pad 1.78)
  other vias: 58.5,57.5
S$264  (via drill 1.1 pad 1.78)
  other vias: 76,57.5
S$265  (via drill 1.1 pad 1.78)
  other vias: 69,57.5
S$266  (via drill 1.1 pad 1.78)
  other vias: 72.5,57.5
S$267  (via drill 1.1 pad 1.78)
  other vias: 79.5,57.5
S$268  (via drill 0.9 pad 1.02, 1.1 pad 1.78)
  Top 0.406: v83,52.5 81.5,51 81.5,49.5
  Bottom 0.406: v83,52.5 v83,57.5
S$269  (via drill 1 pad 1.78)
  Top 0.406: v79.5,53.5 79.5,53 76,49.5 69,49.5 66.5,47 66.5,43.5 67,43
S$270  (via drill 1 pad 1.78)
  Bottom 0.406: v79.5,45.5 77.5,47.5 62.5,47.5 61.5,46.5 61.5,45.5
S$271
  Top 0.406: 61.5,45.5 61.5,44 60.5,43
S$272
  Top 0.406: 81.5,47.5 81.5,45 80.5,44 78,44 77,45
S$273
  Bottom 0.406: 81.5,49.5 81.5,47.5
S$274  (via drill 1.1 pad 1.78)
  other vias: 65.5,61.5
S$275  (via drill 1.1 pad 1.78)
  other vias: 83,61.5
S$276  (via drill 1.1 pad 1.78)
  other vias: 79.5,61.5
S$277  (via drill 1.1 pad 1.78)
  other vias: 76,61.5
S$278  (via drill 1.1 pad 1.78)
  other vias: 69,61.5
S$279  (via drill 1.1 pad 1.78)
  other vias: 72.5,61.5
S$280  (via drill 1.1 pad 1.78)
  other vias: 62,61.5
S$281  (via drill 1.1 pad 1.78)
  other vias: 58.5,61.5
S$282  (via drill 1.1 pad 1.78)
  other vias: 65.5,77.5
S$283  (via drill 1.1 pad 1.78)
  other vias: 62,77.5
S$284  (via drill 1.1 pad 1.78)
  other vias: 58.5,77.5
S$285  (via drill 1.1 pad 1.78)
  other vias: 76,77.5
S$286  (via drill 1.1 pad 1.78)
  other vias: 69,77.5
S$287  (via drill 1.1 pad 1.78)
  other vias: 72.5,77.5
S$288  (via drill 1.1 pad 1.78)
  other vias: 79.5,77.5
S$289  (via drill 0.9 pad 1.02, 1.1 pad 1.78)
  Top 0.406: v83,72.5 81.5,71 81.5,69.5
  Bottom 0.406: v83,72.5 v83,77.5
S$290  (via drill 1 pad 1.78)
  Top 0.406: v79.5,73.5 79.5,73 76,69.5 69,69.5 66.5,67 66.5,63.5 67,63
S$291  (via drill 1 pad 1.78)
  Bottom 0.406: v79.5,65.5 77.5,67.5 62.5,67.5 61.5,66.5 61.5,65.5
S$292
  Top 0.406: 61.5,65.5 61.5,64 60.5,63
S$293
  Top 0.406: 81.5,67.5 81.5,65 80.5,64 78,64 77,65
S$294
  Bottom 0.406: 81.5,69.5 81.5,67.5
S$295  (via drill 1.1 pad 1.78)
  other vias: 65.5,81.5
S$296  (via drill 1.1 pad 1.78)
  other vias: 83,81.5
S$297  (via drill 1.1 pad 1.78)
  other vias: 79.5,81.5
S$298  (via drill 1.1 pad 1.78)
  other vias: 76,81.5
S$299  (via drill 1.1 pad 1.78)
  other vias: 69,81.5
S$300  (via drill 1.1 pad 1.78)
  other vias: 72.5,81.5
S$301  (via drill 1.1 pad 1.78)
  other vias: 62,81.5
S$302  (via drill 1.1 pad 1.78)
  other vias: 58.5,81.5
S$303  (via drill 1.1 pad 1.78)
  other vias: 65.5,97.5
S$304  (via drill 1.1 pad 1.78)
  other vias: 62,97.5
S$305  (via drill 1.1 pad 1.78)
  other vias: 58.5,97.5
S$306  (via drill 1.1 pad 1.78)
  other vias: 76,97.5
S$307  (via drill 1.1 pad 1.78)
  other vias: 69,97.5
S$308  (via drill 1.1 pad 1.78)
  other vias: 72.5,97.5
S$309  (via drill 1.1 pad 1.78)
  other vias: 79.5,97.5
S$310  (via drill 0.9 pad 1.02, 1.1 pad 1.78)
  Top 0.406: v83,92.5 81.5,91 81.5,89.5
  Bottom 0.406: v83,92.5 v83,97.5
S$311  (via drill 1 pad 1.78)
  Top 0.406: v79.5,93.5 79.5,93 76,89.5 69,89.5 66.5,87 66.5,83.5 67,83
S$312  (via drill 1 pad 1.78)
  Bottom 0.406: v79.5,85.5 77.5,87.5 62.5,87.5 61.5,86.5 61.5,85.5
S$313
  Top 0.406: 61.5,85.5 61.5,84 60.5,83
S$314
  Top 0.406: 81.5,87.5 81.5,85 80.5,84 78,84 77,85
S$315
  Bottom 0.406: 81.5,89.5 81.5,87.5
VCC  (via drill 0.9 pad 1.02, 0.9 pad 1.42, 1 pad 1.78)
  Bottom 0.406: v26,6.5 24,6.5 v22.5,8.5 | v22.5,8.5 v22.5,10.5 | v22.5,8.5 16,8.5 15,9.5 7,9.5 5.5,11 3,11 1.5,12.5 v1,12.5
VCC1  (via drill 0.9 pad 1.02, 0.9 pad 1.42, 1 pad 1.78)
  Bottom 0.406: v26,26.5 24,26.5 v22.5,28.5 | v22.5,28.5 v22.5,30.5 | v22.5,28.5 16,28.5 15,29.5 7,29.5 5.5,31 3,31 1.5,32.5 v1,32.5
VCC2  (via drill 0.9 pad 1.02, 0.9 pad 1.42, 1 pad 1.78)
  Bottom 0.406: v26,46.5 24,46.5 v22.5,48.5 | v22.5,48.5 v22.5,50.5 | v22.5,48.5 16,48.5 15,49.5 7,49.5 5.5,51 3,51 1.5,52.5 v1,52.5
VCC3  (via drill 0.9 pad 1.02, 0.9 pad 1.42, 1 pad 1.78)
  Bottom 0.406: v26,66.5 24,66.5 v22.5,68.5 | v22.5,68.5 v22.5,70.5 | v22.5,68.5 16,68.5 15,69.5 7,69.5 5.5,71 3,71 1.5,72.5 v1,72.5
VCC4  (via drill 0.9 pad 1.02, 0.9 pad 1.42, 1 pad 1.78)
  Bottom 0.406: v26,86.5 24,86.5 v22.5,88.5 | v22.5,88.5 v22.5,90.5 | v22.5,88.5 16,88.5 15,89.5 7,89.5 5.5,91 3,91 1.5,92.5 v1,92.5
VCC5  (via drill 0.9 pad 1.02, 0.9 pad 1.42, 1 pad 1.78)
  Bottom 0.406: v54.5,6.5 52.5,6.5 v51,8.5 | v51,8.5 v51,10.5 | v51,8.5 44.5,8.5 43.5,9.5 35.5,9.5 34,11 31.5,11 30,12.5 v29.5,12.5
VCC6  (via drill 0.9 pad 1.02, 0.9 pad 1.42, 1 pad 1.78)
  Bottom 0.406: v54.5,26.5 52.5,26.5 v51,28.5 | v51,28.5 v51,30.5 | v51,28.5 44.5,28.5 43.5,29.5 35.5,29.5 34,31 31.5,31 30,32.5 v29.5,32.5
VCC7  (via drill 0.9 pad 1.02, 0.9 pad 1.42, 1 pad 1.78)
  Bottom 0.406: v54.5,46.5 52.5,46.5 v51,48.5 | v51,48.5 v51,50.5 | v51,48.5 44.5,48.5 43.5,49.5 35.5,49.5 34,51 31.5,51 30,52.5 v29.5,52.5
VCC8  (via drill 0.9 pad 1.02, 0.9 pad 1.42, 1 pad 1.78)
  Bottom 0.406: v54.5,66.5 52.5,66.5 v51,68.5 | v51,68.5 v51,70.5 | v51,68.5 44.5,68.5 43.5,69.5 35.5,69.5 34,71 31.5,71 30,72.5 v29.5,72.5
VCC9  (via drill 0.9 pad 1.02, 0.9 pad 1.42, 1 pad 1.78)
  Bottom 0.406: v54.5,86.5 52.5,86.5 v51,88.5 | v51,88.5 v51,90.5 | v51,88.5 44.5,88.5 43.5,89.5 35.5,89.5 34,91 31.5,91 30,92.5 v29.5,92.5
VCC10  (via drill 0.9 pad 1.02, 0.9 pad 1.42, 1 pad 1.78)
  Bottom 0.406: v83,6.5 81,6.5 v79.5,8.5 | v79.5,8.5 v79.5,10.5 | v79.5,8.5 73,8.5 72,9.5 64,9.5 62.5,11 60,11 58.5,12.5 v58,12.5
VCC11  (via drill 0.9 pad 1.02, 0.9 pad 1.42, 1 pad 1.78)
  Bottom 0.406: v83,26.5 81,26.5 v79.5,28.5 | v79.5,28.5 v79.5,30.5 | v79.5,28.5 73,28.5 72,29.5 64,29.5 62.5,31 60,31 58.5,32.5 v58,32.5
VCC12  (via drill 0.9 pad 1.02, 0.9 pad 1.42, 1 pad 1.78)
  Bottom 0.406: v83,46.5 81,46.5 v79.5,48.5 | v79.5,48.5 v79.5,50.5 | v79.5,48.5 73,48.5 72,49.5 64,49.5 62.5,51 60,51 58.5,52.5 v58,52.5
VCC13  (via drill 0.9 pad 1.02, 0.9 pad 1.42, 1 pad 1.78)
  Bottom 0.406: v83,66.5 81,66.5 v79.5,68.5 | v79.5,68.5 v79.5,70.5 | v79.5,68.5 73,68.5 72,69.5 64,69.5 62.5,71 60,71 58.5,72.5 v58,72.5
VCC14  (via drill 0.9 pad 1.02, 0.9 pad 1.42, 1 pad 1.78)
  Bottom 0.406: v83,86.5 81,86.5 v79.5,88.5 | v79.5,88.5 v79.5,90.5 | v79.5,88.5 73,88.5 72,89.5 64,89.5 62.5,91 60,91 58.5,92.5 v58,92.5
(copper drawn outside any net)
  shapes: Bottom area x45

## Text on the board
tNames: Ho | Se | St | Ri | Le | Do | Up | G | Ho | Se | St | Ri | Le | Do | Up | G | Ho | Se | St | Ri | Le | Do | Up | G | Black.Green.White.Red | Black.Green.White.Red | Black.Green.White.Red | HP | HK | 3P | 3K | LP | MP | LK | MK | HP | HK | 3P | 3K | LP | MP | LK | MK | HP | HK | 3P | 3K | LP | MP | LK | MK | Ho | Se | St | Ri | Le | Do | Up | G | Ho | Se | St | Ri | Le | Do | Up | G | Ho | Se | St | Ri | Le | Do | Up | G | Black.Green.White.Red | Black.Green.White.Red | Black.Green.White.Red | HP | HK | 3P | 3K | LP | MP | LK | MK | HP | HK | 3P | 3K | LP | MP | LK | MK | HP | HK | 3P | 3K | LP | MP | LK | MK | Ho | Se | St | Ri | Le | Do | Up | G | Ho | Se | St | Ri | Le | Do | Up | G | Ho | Se | St | Ri | Le | Do | Up | G | Black.Green.White.Red | Black.Green.White.Red | Black.Green.White.Red | HP | HK | 3P | 3K | LP | MP | LK | MK | HP | HK | 3P | 3K | LP | MP | LK | MK | HP | HK | 3P | 3K | LP | MP | LK | MK | Ho | Se | St | Ri | Le | Do | Up | G | Ho | Se | St | Ri | Le | Do | Up | G | Ho | Se | St | Ri | Le | Do | Up | G | Black.Green.White.Red | Black.Green.White.Red | Black.Green.White.Red | HP | HK | 3P | 3K | LP | MP | LK | MK | HP | HK | 3P | 3K | LP | MP | LK | MK | HP | HK | 3P | 3K | LP | MP | LK | MK | Ho | Se | St | Ri | Le | Do | Up | G | Ho | Se | St | Ri | Le | Do | Up | G | Ho | Se | St | Ri | Le | Do | Up | G | Black.Green.White.Red | Black.Green.White.Red | Black.Green.White.Red | HP | HK | 3P | 3K | LP | MP | LK | MK | HP | HK | 3P | 3K | LP | MP | LK | MK | HP | HK | 3P | 3K | LP | MP | LK | MK
bNames: Ho | Se | St | Ri | Le | Do | Up | G | Ho | Se | St | Ri | Le | Do | Up | G | Ho | Se | St | Ri | Le | Do | Up | G | G | G | G | Tawy Hackpad / Terminal Helper | Tawy Hackpad / Terminal Helper | Tawy Hackpad / Terminal Helper | D- | D- | D- | D+ | D+ | D+ | iA | oA | iB | oB | iA | oA | iB | oB | iA | oA | iB | oB | V | V | V | HP | HK | 3P | 3K | LP | MP | LK | MK | HP | HK | 3P | 3K | LP | MP | LK | MK | HP | HK | 3P | 3K | LP | MP | LK | MK | Ho | Se | St | Ri | Le | Do | Up | G | Ho | Se | St | Ri | Le | Do | Up | G | Ho | Se | St | Ri | Le | Do | Up | G | G | G | G | Tawy Hackpad / Terminal Helper | Tawy Hackpad / Terminal Helper | Tawy Hackpad / Terminal Helper | D- | D- | D- | D+ | D+ | D+ | iA | oA | iB | oB | iA | oA | iB | oB | iA | oA | iB | oB | V | V | V | HP | HK | 3P | 3K | LP | MP | LK | MK | HP | HK | 3P | 3K | LP | MP | LK | MK | HP | HK | 3P | 3K | LP | MP | LK | MK | Ho | Se | St | Ri | Le | Do | Up | G | Ho | Se | St | Ri | Le | Do | Up | G | Ho | Se | St | Ri | Le | Do | Up | G | G | G | G | Tawy Hackpad / Terminal Helper | Tawy Hackpad / Terminal Helper | Tawy Hackpad / Terminal Helper | D- | D- | D- | D+ | D+ | D+ | iA | oA | iB | oB | iA | oA | iB | oB | iA | oA | iB | oB | V | V | V | HP | HK | 3P | 3K | LP | MP | LK | MK | HP | HK | 3P | 3K | LP | MP | LK | MK | HP | HK | 3P | 3K | LP | MP | LK | MK | Ho | Se | St | Ri | Le | Do | Up | G | Ho | Se | St | Ri | Le | Do | Up | G | Ho | Se | St | Ri | Le | Do | Up | G | G | G | G | Tawy Hackpad / Terminal Helper | Tawy Hackpad / Terminal Helper | Tawy Hackpad / Terminal Helper | D- | D- | D- | D+ | D+ | D+ | iA | oA | iB | oB | iA | oA | iB | oB | iA | oA | iB | oB | V | V | V | HP | HK | 3P | 3K | LP | MP | LK | MK | HP | HK | 3P | 3K | LP | MP | LK | MK | HP | HK | 3P | 3K | LP | MP | LK | MK | Ho | Se | St | Ri | Le | Do | Up | G | Ho | Se | St | Ri | Le | Do | Up | G | Ho | Se | St | Ri | Le | Do | Up | G | G | G | G | Tawy Hackpad / Terminal Helper | Tawy Hackpad / Terminal Helper | Tawy Hackpad / Terminal Helper | D- | D- | D- | D+ | D+ | D+ | iA | oA | iB | oB | iA | oA | iB | oB | iA | oA | iB | oB | V | V | V | HP | HK | 3P | 3K | LP | MP | LK | MK | HP | HK | 3P | 3K | LP | MP | LK | MK | HP | HK | 3P | 3K | LP | MP | LK | MK
_tNames: HEXINVERTER | HEXINVERTER | HEXINVERTER | HEXINVERTER | HEXINVERTER | HEXINVERTER | HEXINVERTER | HEXINVERTER | HEXINVERTER | HEXINVERTER | HEXINVERTER | HEXINVERTER | HEXINVERTER | HEXINVERTER | HEXINVERTER